# Altium PCB PCB_象鼻吸盘电源电路_2025-11-01.pcbdoc
Units mil, origin at the board's own origin, x right, y up, seen from the top; angles counter-clockwise.
Board outline 4555.27 x 2928 mil, 2 copper layers (Top Layer, Bottom Layer); 51 components, 45 nets, 150 pads, 3 vias.
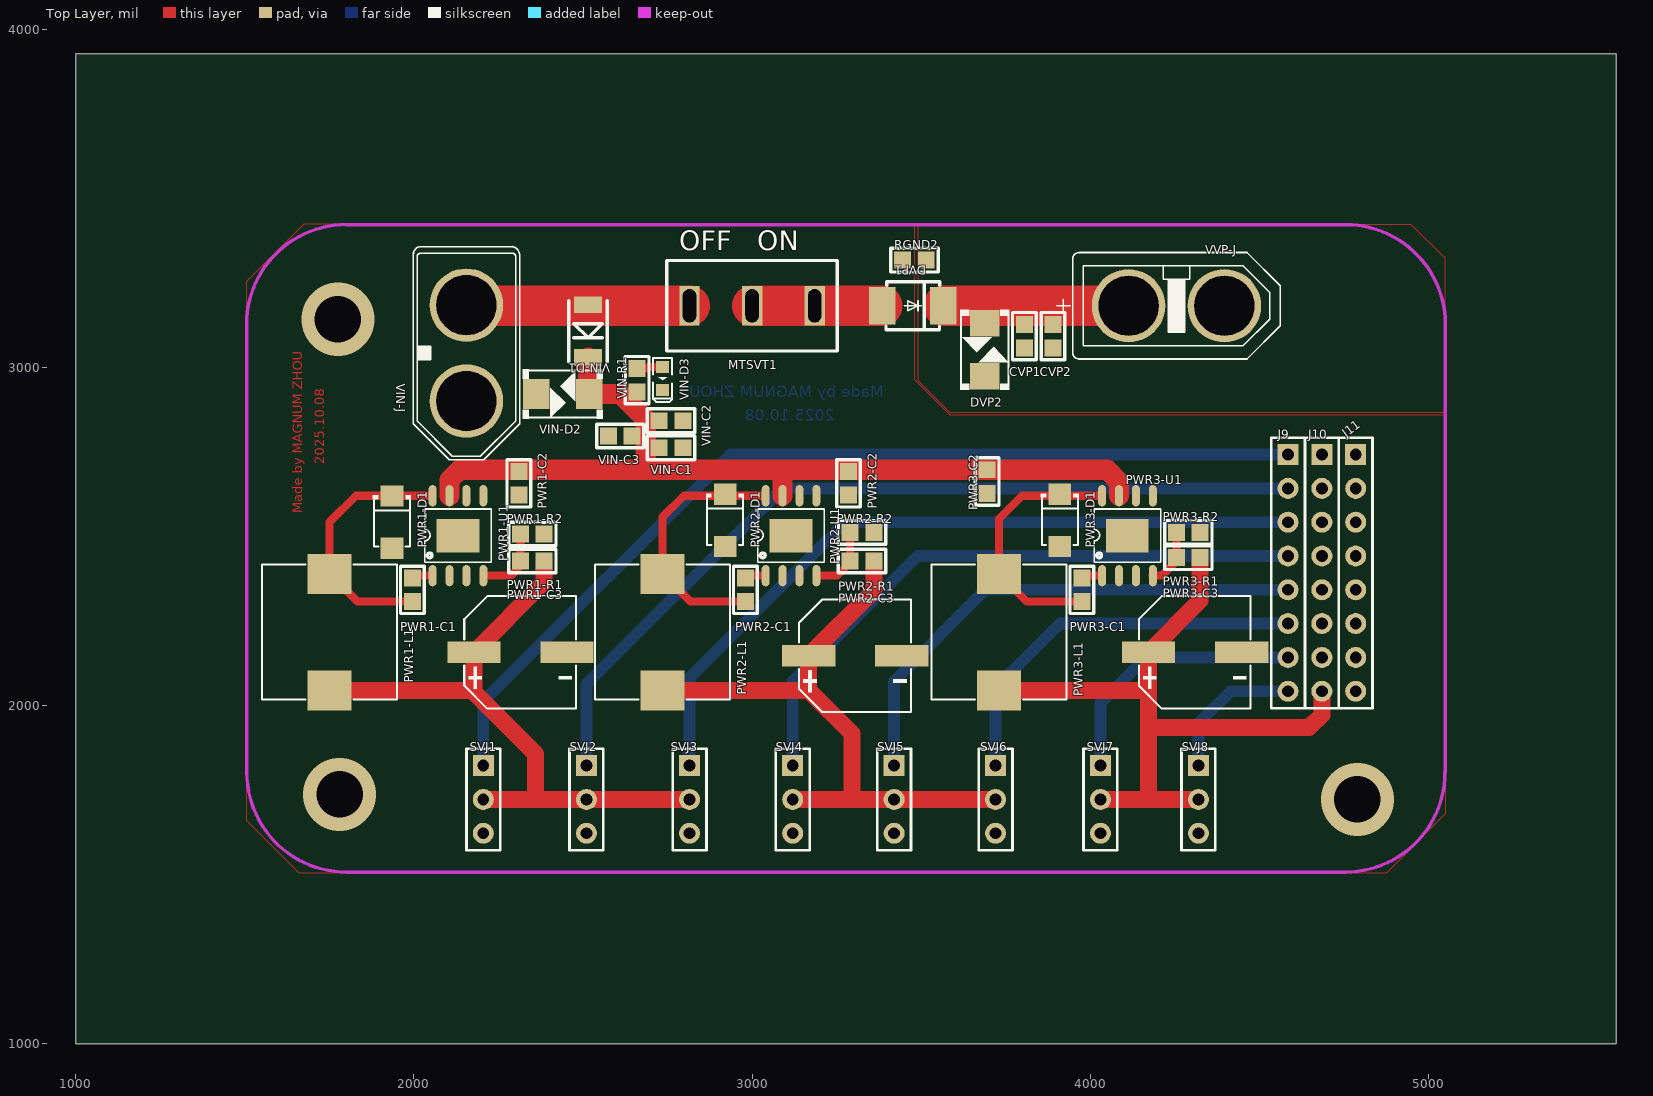
[diagram p0: Top Layer view]
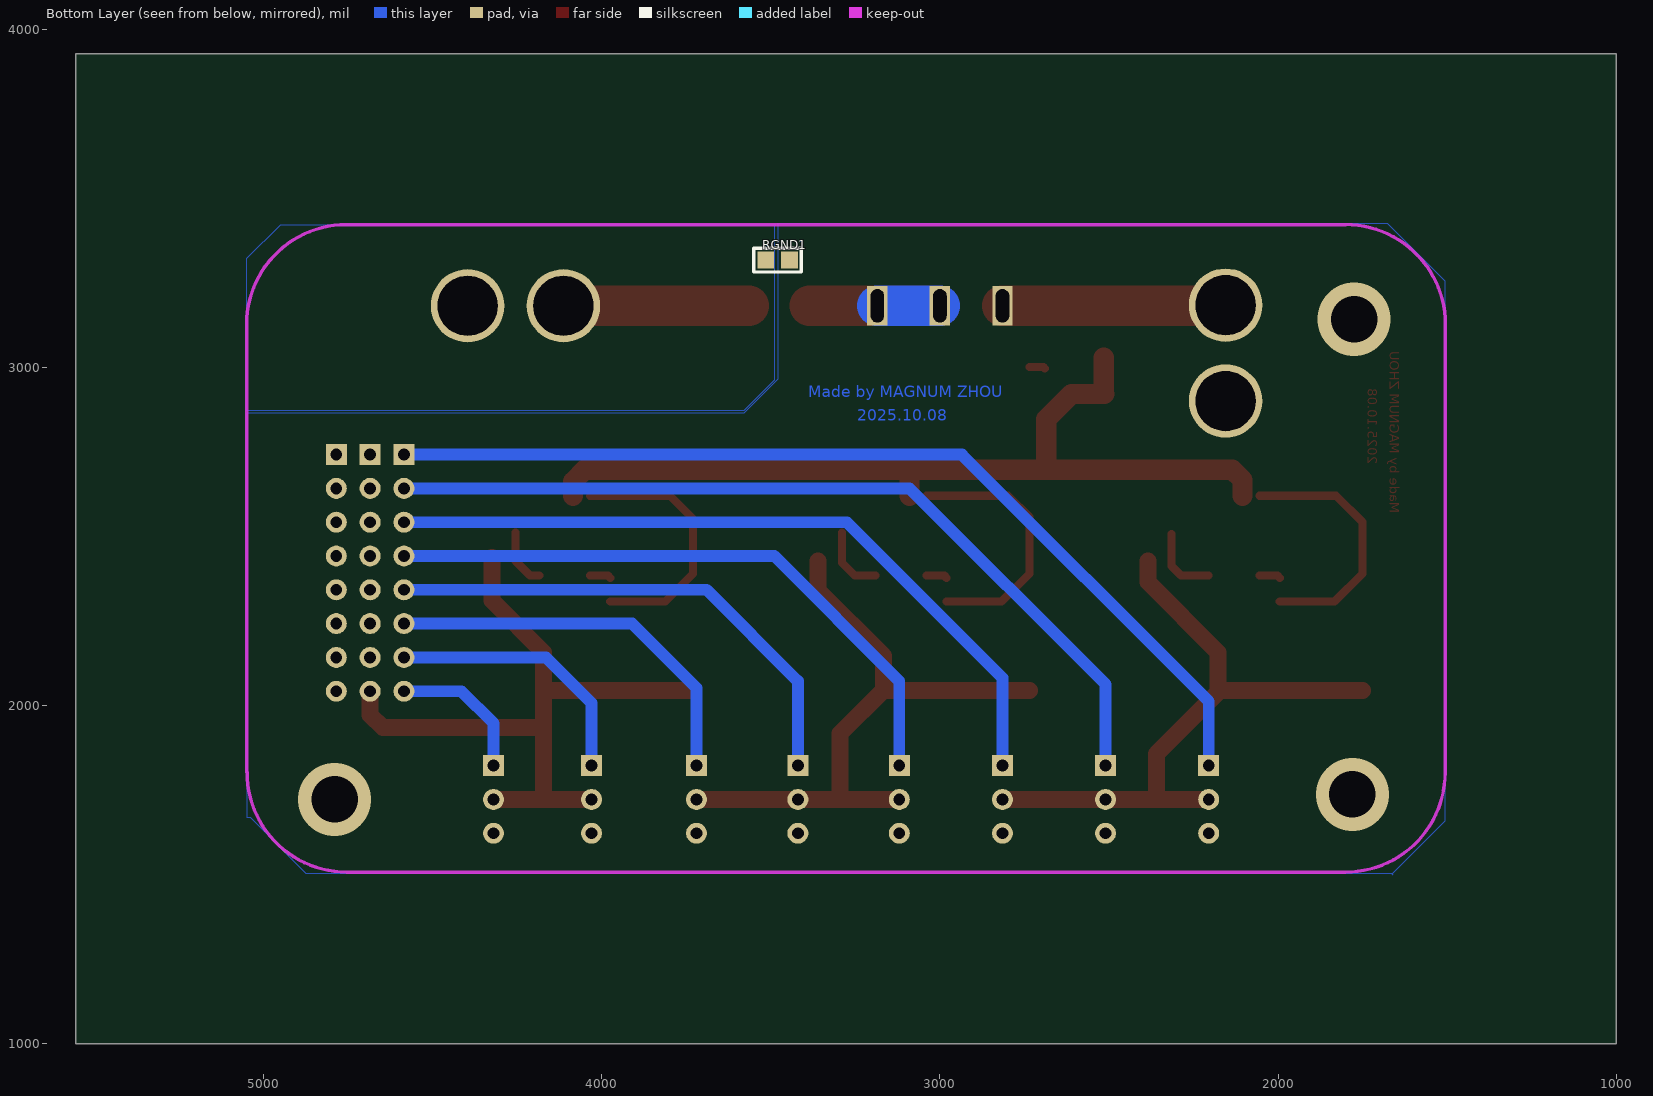
[diagram p1: Bottom Layer view, seen from below]

## Layer stack, top to bottom
Top Layer: signal copper (thickness not stored)
Dielectric: dielectric 12.6, FR-4, Dk 4.8
Bottom Layer: signal copper (thickness not stored)

## Board outline
5555.27,1000 1000,1000 1000,3928 5555.27,3928

## Components (designator, comment, footprint, x,y, rotation, side; value= is the part's Value field where it differs from the comment)
CVP1 "100u" 0603_DIY#1 3770,3023 r90 top
CVP2 "100n" 0603_DIY#1 3855,3023 r90 top
DVP1 "SS56" SS56 3475,3183 r180 top
DVP2 "SMBJ28CA-A" SMBJ28 3685,3048 r90 top
J9 "HDR-M-2.54_1x8" HDR-M-2.54_1X8 4585,2343 r270 top
J10 "HDR-M-2.54_1x8" HDR-M-2.54_1X8 4685,2343 r270 top
J11 "HDR-M-2.54_1x8" HDR-M-2.54_1X8 4785,2343 r270 top
MTSVT1 "MTS-102妞子开关" MTS102 3005,3183 r0 top
PWR1-C1 "10n" 0603_DIY#1 2030,2413 r270 top
PWR1-C2 "10u" 0603_DIY#1 2345,2728 r270 top
PWR1-C3 "330uF" CAP-SMD_BD8.0-L8.3-W8.3-LS9.3-FD-2 2315,2158 r0 top
PWR1-D1 "B340AF-13" SMAF_L3.5-W2.6-LS4.7-RD 1935,2543 r270 top
PWR1-L1 "15uH" IND-SMD_L10.0-W10.0_MDA1050-3R3M 1750,2218 r270 top
PWR1-R1 "10k" 0603_DIY#1 2280,2463 r0 top
PWR1-R2 "3.3k" 0603_DIY#1 2420,2473 r180 top
PWR1-U1 "TPS5430MDDAREP" POWERPAD-SO-8_L4.9-W3.9-P1.27-LS6.0-BL-EP 2130,2503 r0 top
PWR2-C1 "10n" 0603_DIY#1 3015,2413 r270 top
PWR2-C2 "10u" 0603_DIY#1 3320,2728 r270 top
PWR2-C3 "330uF" CAP-SMD_BD8.0-L8.3-W8.3-LS9.3-FD-2 3305,2148 r0 top
PWR2-D1 "B340AF-13" SMAF_L3.5-W2.6-LS4.7-RD 2920,2548 r270 top
PWR2-L1 "15uH" IND-SMD_L10.0-W10.0_MDA1050-3R3M 2735,2218 r270 top
PWR2-R1 "10k" 0603_DIY#1 3255,2463 r0 top
PWR2-R2 "3.3k" 0603_DIY#1 3395,2478 r180 top
PWR2-U1 "TPS5430MDDAREP" POWERPAD-SO-8_L4.9-W3.9-P1.27-LS6.0-BL-EP 3115,2503 r0 top
PWR3-C1 "10n" 0603_DIY#1 4010,2413 r270 top
PWR3-C2 "10u" 0603_DIY#1 3730,2733 r270 top
PWR3-C3 "330uF" CAP-SMD_BD8.0-L8.3-W8.3-LS9.3-FD-2 4310,2158 r0 top
PWR3-D1 "B340AF-13" SMAF_L3.5-W2.6-LS4.7-RD 3910,2548 r270 top
PWR3-L1 "15uH" IND-SMD_L10.0-W10.0_MDA1050-3R3M 3730,2218 r270 top
PWR3-R1 "10k" 0603_DIY#1 4220,2473 r0 top
PWR3-R2 "3.3k" 0603_DIY#1 4360,2478 r180 top
PWR3-U1 "TPS5430MDDAREP" POWERPAD-SO-8_L4.9-W3.9-P1.27-LS6.0-BL-EP 4110,2503 r0 top
RGND1 "0" 0603_DIY#2 3410,3283 r180 bottom
RGND2 "0" 0603_DIY#1 3410,3353 r0 top
SVJ1 "HDR-M-2.54_1x3" HDR-M-2.54_1X3 2205,1723 r270 top
SVJ2 "HDR-M-2.54_1x3" HDR-M-2.54_1X3 2510,1723 r270 top
SVJ3 "HDR-M-2.54_1x3" HDR-M-2.54_1X3 2815,1723 r270 top
SVJ4 "HDR-M-2.54_1x3" HDR-M-2.54_1X3 3120,1723 r270 top
SVJ5 "HDR-M-2.54_1x3" HDR-M-2.54_1X3 3420,1723 r270 top
SVJ6 "HDR-M-2.54_1x3" HDR-M-2.54_1X3 3720,1723 r270 top
SVJ7 "HDR-M-2.54_1x3" HDR-M-2.54_1X3 4030,1723 r270 top
SVJ8 "HDR-M-2.54_1x3" HDR-M-2.54_1X3 4320,1723 r270 top
VIN-C1 "100u" 0603_DIY#1 2830,2728 r180 top
VIN-C2 "100u" 0603_DIY#1 2830,2808 r180 top
VIN-C3 "100u" 0603_DIY#1 2540,2833 r0 top
VIN-D1 "SS54" DO-214AC 2515,3108 r90 top
VIN-D2 "SMBJ28CA-A" SMBJ28 2435,2925 r0 top
VIN-D3 "LED-0603_R" LED0603_RED 2735,2968 r270 top
VIN-J "XT60PB-M.G.Y" CONN-TH_XT60PB-M 2155,3043 r90 top
VIN-R1 "2k" 0603_DIY#1 2695,3033 r270 top
VVP-J "XT60-F" CONN-TH_XT60PB-F 4255,3183 r180 top

## Footprints (in the part's own frame and the unit in brackets; to place one, negate y for a bottom-side part, rotate by r counter-clockwise, add the part's x,y. Pads: shape width x height; smd on the part's side, far side on the other; paste and mask are expansions set on the pad)
0603_DIY#1 [mil]
  rect 50x50 smd paste+0 mask+4: 1(35,-35) 2(105,-35)
  silkscreen extent 0,-70 140,0
0603_DIY#2 [mil]
  rect 50x50 smd paste+0 mask+4: 1(-35,35) 2(-105,35)
  silkscreen extent -140,0 0,70
CAP-SMD_BD8.0-L8.3-W8.3-LS9.3-FD-2 [mm]
  rect 4x1.6 smd paste+0 mask+0.051: 1(-3.5,0) 2(3.5,0)
  silkscreen extent -4.23,-4.23 4.18,4.23
CONN-TH_XT60PB-F [mil]
  round 217.16 hole 177.16 slot 177.36 at 0 deg paste+0 mask+2: +(141.73,0) -(-141.73,0)
  silkscreen extent -307,-157 354,157
CONN-TH_XT60PB-M [mil]
  round 217.16 hole 177.16 slot 177.36 at 0 deg paste+0 mask+2: 1(141.73,0) 2(-141.73,0)
  silkscreen extent -315,-158 315,158
DO-214AC [mil]
  rect 50x82.7 smd paste+0 mask+2: 1(-78,0) 2(78,0)
  silkscreen extent -90,-57 90,57
HDR-M-2.54_1X3 [mil]
  rect 62x62 hole 35 paste+0 mask+2: 1(-100,0)
  round 62 hole 35 paste+0 mask+2: 2(0,0) 3(100,0)
  silkscreen extent -150,-50 150,50
HDR-M-2.54_1X8 [mil]
  rect 62x62 hole 35 paste+0 mask+2: 1(-400,0)
  round 62 hole 35 paste+0 mask+2: 2(-300,0) 3(-200,0) 4(-100,0) 5(0,0) 6(100,0) 7(200,0) 8(300,0)
  silkscreen extent -450,-50 350,50
IND-SMD_L10.0-W10.0_MDA1050-3R3M [mm]
  rect 3x3.32 smd paste+0 mask+0.051: 1(4.378,0) 2(-4.378,0)
  silkscreen extent -5.08,-5.08 5.08,5.08
LED0603_RED [mm]
  rect 0.9x1 smd paste+0 mask+0.051: 1(-0.85,0) 2(0.85,0)
  silkscreen extent -1.54,-0.73 1.75,0.73
MTS102 [mm]
  rect 1.524x3 hole 1 slot 2.5 at 90 deg paste+0 mask+0.051: 1(-4.826,0) 2(-0.126,0) 3(4.574,0)
  silkscreen extent -6.53,-3.4 6.27,3.4
POWERPAD-SO-8_L4.9-W3.9-P1.27-LS6.0-BL-EP [mm]
  oval 0.6x1.6 smd paste+0 mask+0.051: 1(-1.905,-3) 2(-0.635,-3) 3(0.635,-3) 4(1.905,-3) 5(1.905,3) 6(0.635,3) 7(-0.635,3) 8(-1.905,3)
  rect 3.2x2.5 smd paste+0 mask+0.051: 9(0,0)
  silkscreen extent -2.5,-2 2.5,2
SMAF_L3.5-W2.6-LS4.7-RD [mm]
  rect 1.6x1.7 smd paste+0 mask+0.051: 1(-1.96,0) 2(1.96,0)
  silkscreen extent -2.01,-1.43 1.83,1.42
SMBJ28 [mil]
  rect 78.74x88.23 smd paste+0 mask+2: 1(83.78,-3) 2(-73.7,-3)
  silkscreen extent -113,-76 123,70
SS56 [mm]
  rect 2x2.8 smd paste+0 mask+0.102: 1(-2.3,0) 2(2.3,0)
  silkscreen extent -2.03,-1.8 2.01,1.8

## Via types
v1: diameter 216.54, hole 137.8, Top Layer to Bottom Layer, tented both sides, 3 vias

## Nets (pads, with @x,y where several pads share a name; then routed paths per layer and width w, separated by ;. In a path a pad name is that pad's centre, name@x,y a point inside that pad or via, vN(x,y) a via of type N, cw(c..) or ccw(c..) an arc to the next point about the centre after c; other vN are vias at no path point)
DVP1_2: DVP1.2 MTSVT1.2 MTSVT1.3 | length 569.4
  Top Layer w120: MTSVT1.2 MTSVT1.3 DVP1.2
  Bottom Layer w120: MTSVT1.2 MTSVT1.3
GND: J11.1 J11.2 J11.3 J11.4 J11.5 J11.6 J11.7 J11.8 PWR1-C2.2 PWR1-C3.2 PWR1-D1.2 PWR1-R2.1 PWR1-U1.6 PWR1-U1.9 PWR2-C2.2 PWR2-C3.2 PWR2-D1.2 PWR2-R2.1 PWR2-U1.6 PWR2-U1.9 PWR3-C2.2 PWR3-C3.2 PWR3-D1.2 PWR3-R2.1 PWR3-U1.6 PWR3-U1.9 RGND1.1 RGND2.1 SVJ1.3 SVJ2.3 SVJ3.3 SVJ4.3 SVJ5.3 SVJ6.3 SVJ7.3 SVJ8.3 VIN-C1.1 VIN-C2.1 VIN-C3.1 VIN-D2.2 VIN-D3.2 VIN-J.2
  other v1: 4790,1723 1780,1738 1775,3143
GNDVP: CVP1.1 CVP2.1 DVP2.2 RGND1.2 RGND2.2 VVP-J.-
J10_1: J10.1
J10_2: J10.2
J10_3: J10.3
J10_4: J10.4
J10_5: J10.5
J10_6: J10.6
J10_7: J10.7
PWR1-5V: PWR1-C3.1 PWR1-L1.1 PWR1-R1.2 SVJ1.2 SVJ2.2 SVJ3.2 | length 1901.1
  Top Layer w50: PWR1-L1.1 2172.36,2045.64 2359.8,1858.2 2359.8,1723 ; 2177.21,2045.64 PWR1-C3.1 2385,2365.79 PWR1-R1.2 ; SVJ1.2 SVJ3.2
PWR1-C1_1: PWR1-C1.1 PWR1-U1.1 | length 62.9
  Top Layer w24: PWR1-C1.1 2001.89,2384.89 PWR1-U1.1
PWR1-L1_2: PWR1-C1.2 PWR1-D1.1 PWR1-L1.2 PWR1-U1.8 | length 769.1
  Top Layer w24: PWR1-C1.2 1832.36,2308 PWR1-L1.2 1750,2543 1828.11,2621.11 PWR1-U1.8
PWR1-R2_2: PWR1-R1.1 PWR1-R2.2 PWR1-U1.4 | length 216.6
  Top Layer w24: PWR1-U1.4 2286.89,2384.89 2315,2413 PWR1-R2.2
PWR1-U1_2: PWR1-U1.2
PWR1-U1_3: PWR1-U1.3
PWR1-U1_5: PWR1-U1.5
PWR2-5V: PWR2-C3.1 PWR2-L1.1 PWR2-R1.2 SVJ4.2 SVJ5.2 SVJ6.2 | length 1870.1
  Top Layer w50: PWR2-L1.1 3167.36,2045.64 3295,1918 3295,1723 ; SVJ4.2 SVJ6.2 ; 3167.21,2045.6 PWR2-C3.1 3360,2340.79 PWR2-R1.2
PWR2-U1_1: PWR2-C1.1 PWR2-U1.1 | length 62.8
  Top Layer w24: PWR2-C1.1 2986.89,2384.89 PWR2-U1.1
PWR2-U1_2: PWR2-U1.2
PWR2-U1_3: PWR2-U1.3
PWR2-U1_4: PWR2-R1.1 PWR2-R2.2 PWR2-U1.4 | length 205.8
  Top Layer w24: PWR2-U1.4 3251.89,2384.89 3290,2423 PWR2-R2.2
PWR2-U1_5: PWR2-U1.5
PWR2-U1_8: PWR2-C1.2 PWR2-D1.1 PWR2-L1.2 PWR2-U1.8 | length 777.9
  Top Layer w24: PWR2-C1.2 2817.36,2308 PWR2-L1.2 2735,2558 2798.11,2621.11 PWR2-U1.8
PWR3-5V: J10.8 PWR3-C3.1 PWR3-L1.1 PWR3-R1.2 SVJ7.2 SVJ8.2 | length 2108.9
  Top Layer w50: PWR3-L1.1 4172.21,2045.64 ; SVJ7.2 SVJ8.2 ; 4172.21,1723 PWR3-C3.1 4325,2310.79 PWR3-R1.2 ; 4172.21,1935.29 4647.29,1935.29 4685,1973 J10.8
PWR3-U1_1: PWR3-C1.1 PWR3-U1.1 | length 62.8
  Top Layer w24: PWR3-C1.1 3981.89,2384.89 PWR3-U1.1
PWR3-U1_2: PWR3-U1.2
PWR3-U1_3: PWR3-U1.3
PWR3-U1_4: PWR3-R1.1 PWR3-R2.2 PWR3-U1.4 | length 172.9
  Top Layer w24: PWR3-U1.4 4211.89,2384.89 4255,2428 PWR3-R2.2
PWR3-U1_5: PWR3-U1.5
PWR3-U1_8: PWR3-C1.2 PWR3-D1.1 PWR3-L1.2 PWR3-U1.8 | length 775
  Top Layer w24: PWR3-C1.2 3812.36,2308 PWR3-L1.2 3730,2553 3798.11,2621.11 PWR3-U1.8
S$8771: 
S$8775: 
SV01: J9.1 SVJ1.1 | length 2872.4
  Bottom Layer w35: SVJ1.1 2205,2013 2935,2743 J9.1
SV02: J9.2 SVJ2.1 | length 2555.2
  Bottom Layer w35: SVJ2.1 2510,2063 3090,2643 J9.2
SV03: J9.3 SVJ3.1 | length 2220.5
  Bottom Layer w35: SVJ3.1 2815,2083 3275,2543 J9.3
SV04: J9.4 SVJ4.1 | length 1868.3
  Bottom Layer w35: SVJ4.1 3120,2073 3490,2443 J9.4
SV05: J9.5 SVJ5.1 | length 1526.8
  Bottom Layer w35: SVJ5.1 3420,2073 3690,2343 J9.5
SV06: J9.6 SVJ6.1 | length 1173.7
  Bottom Layer w35: SVJ6.1 3720,2053 3910,2243 J9.6
SV07: J9.7 SVJ7.1 | length 795.9
  Bottom Layer w35: SVJ7.1 4030,2008 4165,2143 J9.7
SV08: J9.8 SVJ8.1 | length 429.4
  Bottom Layer w35: SVJ8.1 4320,1948 4415,2043 J9.8
VCC: PWR1-C2.1 PWR1-U1.7 PWR2-C2.1 PWR2-U1.7 PWR3-C2.1 PWR3-U1.7 VIN-C1.2 VIN-C2.2 VIN-C3.2 VIN-D1.1 VIN-D2.1 VIN-R1.2 | length 2633
  Top Layer w60: PWR1-U1.7 2105,2668 2135,2698 4050,2698 4085,2663 PWR3-U1.7 ; VIN-D1.1 2515,2923.22 2513.78,2922 2611,2922 2685,2848 2685,2698 ; PWR2-U1.7 3089.99,2698
VIN: MTSVT1.1 VIN-D1.2 VIN-J.1 | length 660.7
  Top Layer w120: VIN-J.1 2156.73,3183 MTSVT1.1
VIN-D3_1: VIN-D3.1 VIN-R1.1 | length 46.4
  Top Layer w24: 2690,2998 2693.47,3001.47 VIN-D3.1
VVP: CVP1.2 CVP2.2 DVP1.1 DVP2.1 VVP-J.+ | length 550.2
  Top Layer w120: DVP1.1 VVP-J.+ VVP-J.+@4115,3184.73

## Polygon pours and split planes (outlines as drawn)
GNDVP on Bottom Layer (solid): 3485,3423 3490,3418 3490,2963 3580,2873 5050,2873 5050,3323 4950,3423 3495,3423
GND on Bottom Layer (solid): 3480,3425 3480,2965 3580,2865 5050,2865 5050,1670 5040,1670 4875,1505 1665,1505 1660,1500 1660,1505 1505,1660 1505,3255 1675,3425
GNDVP on Top Layer (solid): 3490,3423 3490,2963 3580,2873 3585,2868 5050,2868 5050,3323 4950,3423 3490,3423
GND on Top Layer (solid): 3480,3425 3480,2965 3585,2860 5050,2860 5050,1680 4875,1505 1660,1505 1505,1660 1505,3255 1675,3425 3480,3425

## Keep-outs
Keep-Out Layer:
  lines w10: 1505,3128 cw(c1800.27,3128) 1800.27,3423.27 ; 1505.59,1803.19 ccw(c1800.86,1803.19) 1800.86,1507.92 ; 4753.62,1507.92 ccw(c4753.62,1803.19) 5048.89,1803.19 ; 4755,3423 cw(c4755,3127.73) 5050.27,3127.73

## Other copper
Top Layer:
  text "2025.10.08" at 1734,2715 h28 r90
  text "Made by MAGNUM ZHOU" at 1669,2570 h28 r90
Bottom Layer:
  text "Made by MAGNUM ZHOU" at 3390,2913 h34
  text "2025.10.08" at 3245,2843 h34

## Silkscreen, mask and mechanical layers (free items; w line width, h text height)
Top Overlay:
  text "OFF   ON" at 2785,3328 h100